# Altium PCB PCB1.PcbDoc (part 1 of 2)
Units mm, origin at the board's own origin, x right, y up, seen from the top; angles counter-clockwise.
Board outline 210 x 140 mm, 2 copper layers (Top Layer, Bottom Layer); 228 components, 149 nets, 688 pads, 245 vias.
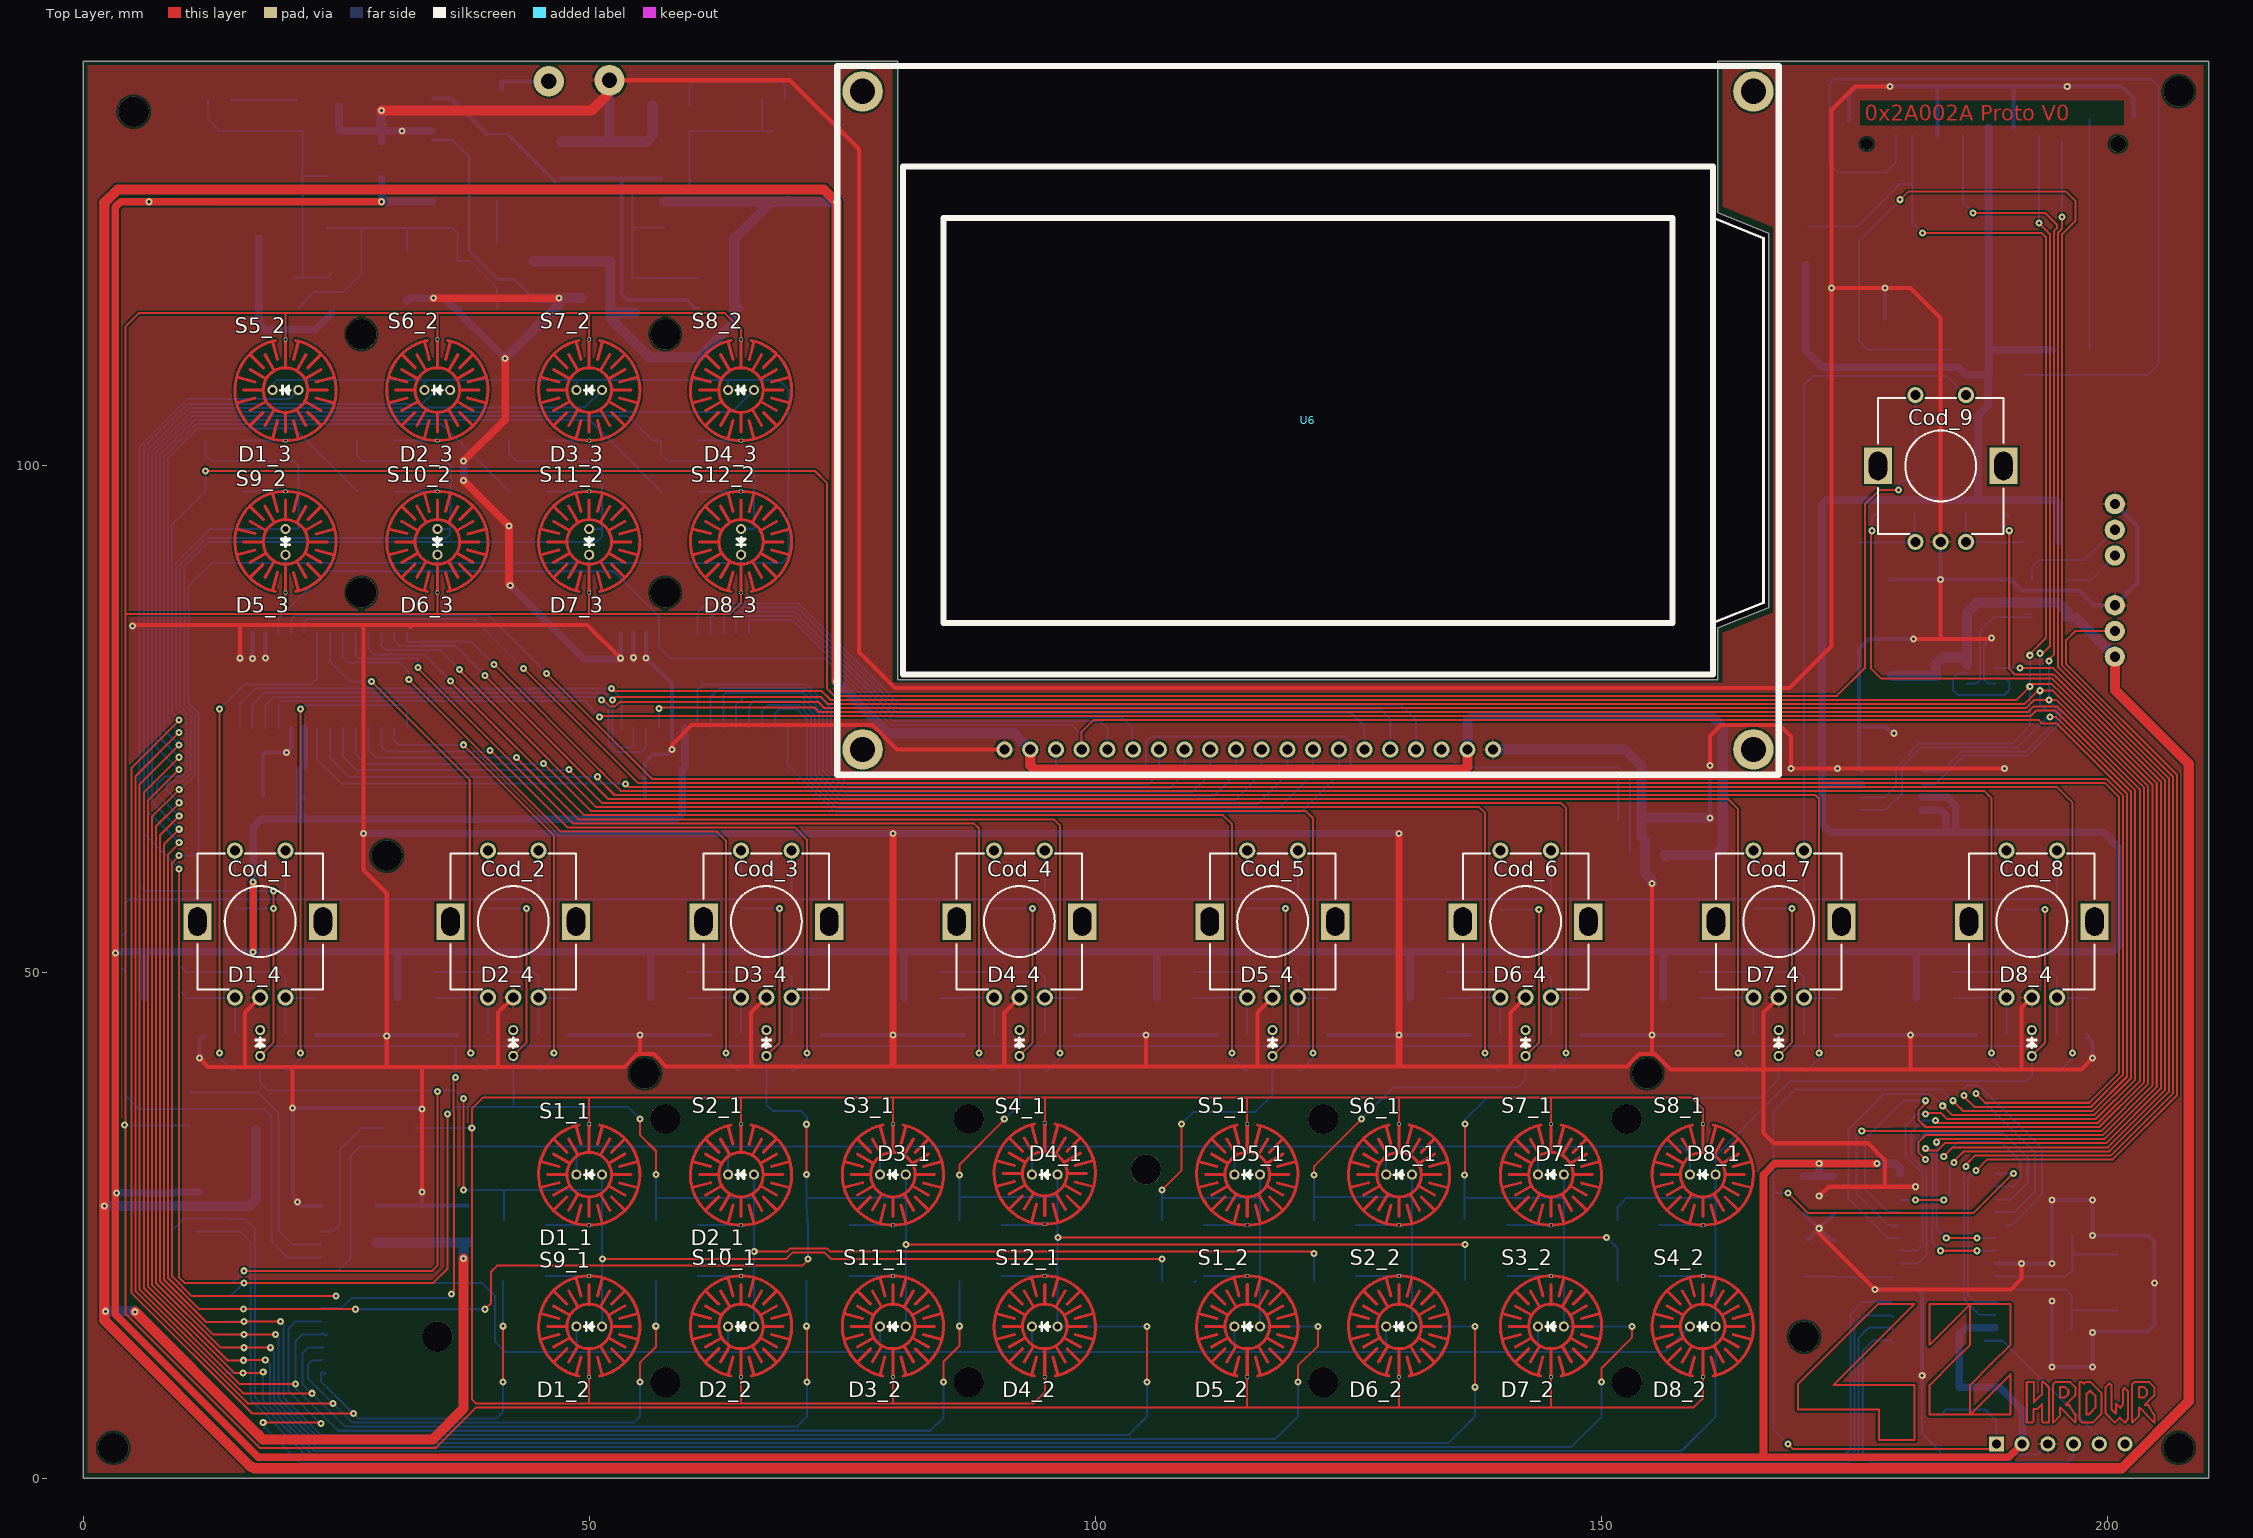
[diagram p0: Top Layer view]
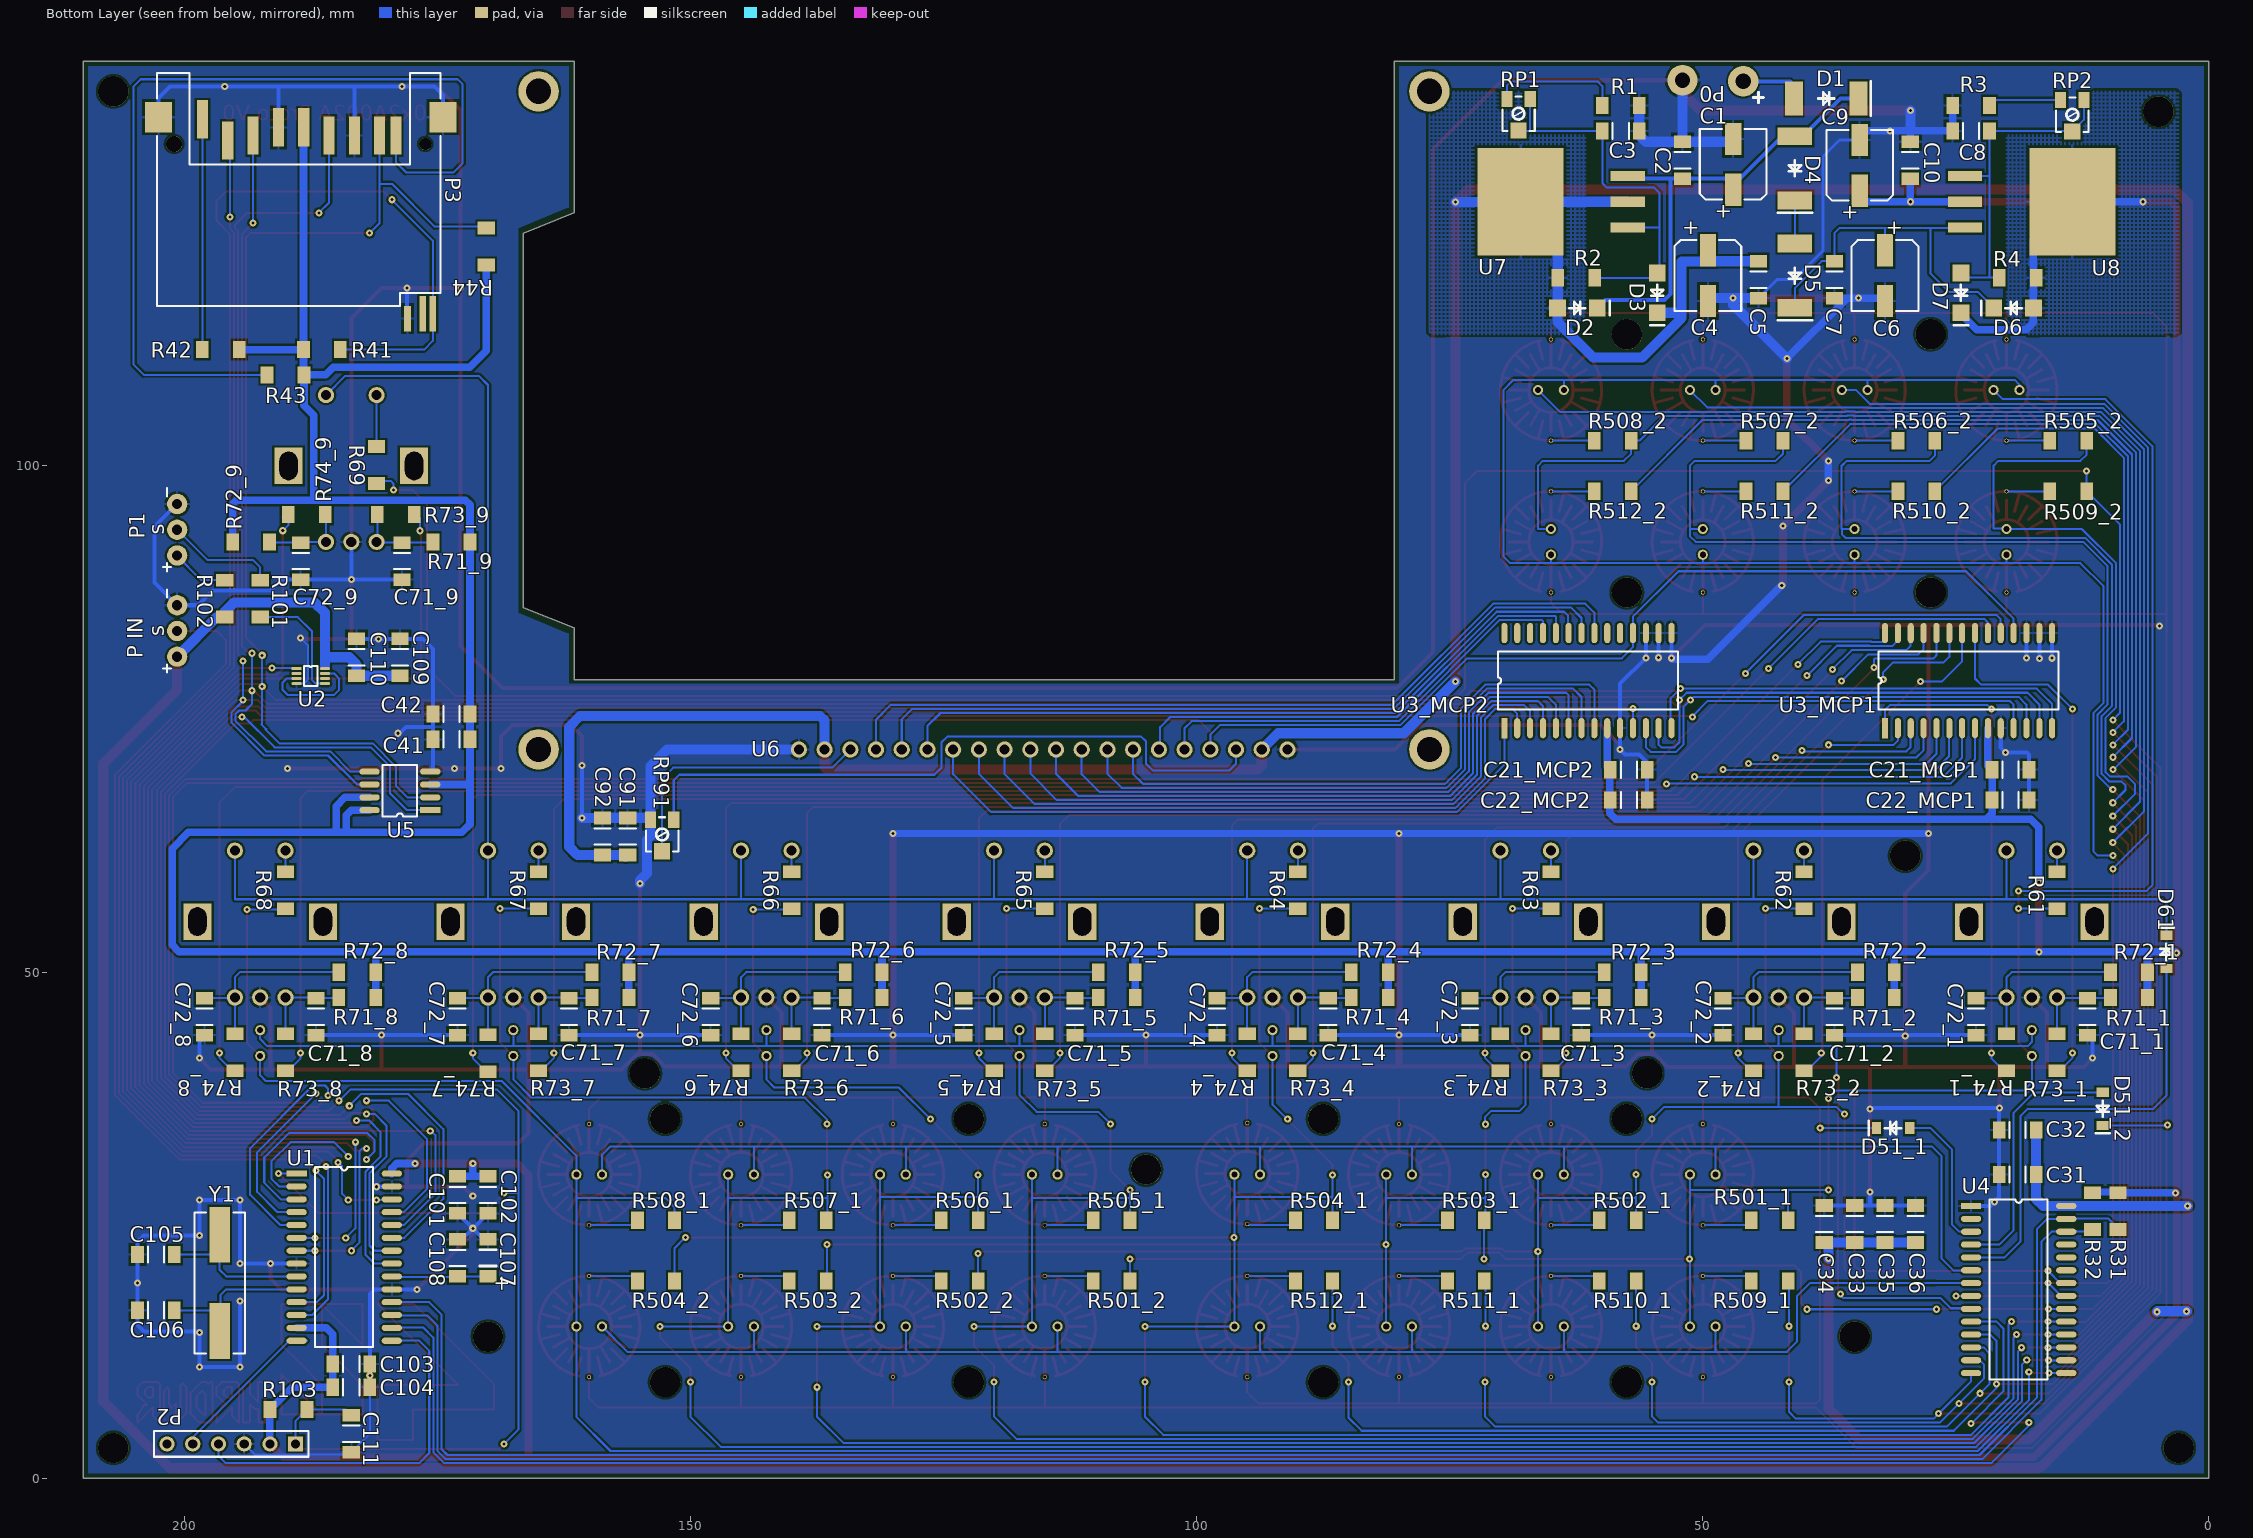
[diagram p1: Bottom Layer view, seen from below]

## Layer stack, top to bottom
Top Solder: solder mask 0.0102, Solder Resist, Dk 3.5
Top Layer: signal copper 0.0356
Dielectric 1: dielectric 0.32, FR-4, Dk 4.8
Bottom Layer: signal copper 0.0356
Bottom Solder: solder mask 0.0102, Solder Resist, Dk 3.5

## Board outline
0,0 0,140 80.5,140 80.5,78.9 161.5,78.9 161.5,84 166.5,86 166.5,109.5 166.5,123 161.5,125 161.5,140 210,140 210,0

## Design rules (kind name [scope] priority, off if disabled: settings)
Clearance [All] p1: gap=0.2
HoleSize [All] p1: absolutevalues=TRUE maxlimit=3 minlimit=0.3 maxpercent=80.000 minpercent=20.000
MinimumSolderMaskSliver [All] p1: minsoldermaskwidth=0.1
NetAntennae NetAntennaePad [HasFootprint('PAD')] p1: netantennaetolerance=42
NetAntennae NetAntennae_1 [All] p2: netantennaetolerance=0
PolygonConnect PolygonConnect_2 [IsVia] p1: connectstyle=Direct reliefconductorwidth=0.254 reliefentries=4 polygonreliefangle="90 Angle" airgapwidth=0.254
PolygonConnect PolygonConnect_1 [All] p2: connectstyle=Relief reliefconductorwidth=0.254 reliefentries=4 polygonreliefangle="90 Angle" airgapwidth=0.254
RoutingVias [All] p1: holewidth=0.711 width=1.27 viastyle="Through Hole" minholewidth=0.3 minwidth=0.6 maxholewidth=0.711 maxwidth=1.27
SilkToBoardRegionClearance [not HasFootprint('LCD-128H064A')] p1:
SilkToSilkClearance [All] p1: silktosilkclearance=0.1
SilkToSolderMaskClearance [IsPad] p1: minsilkscreentomaskgap=0.1 clearancetoexposedcopper=TRUE
SolderMaskExpansion [All] p1: expansion=0.102
UnpouredPolygon [All] p1: allowunpoured=FALSE
Width [All] p1: maxlimit=1 minlimit=0.2 preferedwidth=0.2
23 further rules are at their usual default settings.

## Classes and differential pairs
component class 1: C71_1 C72_1 R71_1 R72_1 R73_1 R74_1
component class 2: C71_2 C72_2 R71_2 R72_2 R73_2 R74_2
component class 3: C71_3 C72_3 R71_3 R72_3 R73_3 R74_3
component class 4: C71_4 C72_4 R71_4 R72_4 R73_4 R74_4
component class 5: C71_5 C72_5 R71_5 R72_5 R73_5 R74_5
component class 6: C71_6 C72_6 R71_6 R72_6 R73_6 R74_6
component class 7: C71_7 C72_7 R71_7 R72_7 R73_7 R74_7
component class 8: C71_8 C72_8 R71_8 R72_8 R73_8 R74_8
component class 9: C71_9 C72_9 R71_9 R72_9 R73_9 R74_9
component class CoderSwitches: D61 R61 R62 R63 R64 R65 R66 R67 R68 R69
component class HT16: C31 C32 C33 C34 C35 C36 R31 R32 U4
component class MCP1: C21_MCP1 C22_MCP1 U3_MCP1
component class MCP2: C21_MCP2 C22_MCP2 U3_MCP2
component class MEM: C41 C42 P3 R41 R42 R43 U5
component class PWR: C1 C2 C3 C4 C5 C6 C7 C8 C9 C10 D1 D2 D3 D4 D5 D6 D7 P0 R1 R2 R3 R4 RP1 RP2 U7 U8
component class Screen: C91 C92 RP91 U6
component class uC: C101 C102 C103 C104 C105 C106 C107 C108 C109 C110 C111 P1 P2 "P IN" R101 R102 R103 U1 U2 Y1
channel class 2-MCP23S17: MCP1 MCP2
channel class 5-Pads: PadsPart1 PadsPart2
channel class 7-Encodeurs: 1 2 3 4 5 6 7 8 9
channel class 8-LEDx8: LedsPart1 LedsPart2 LedsPart3 LedsPart4

## Components (designator, comment, footprint, x,y, rotation, side; value= is the part's Value field where it differs from the comment)
C1 "470uF" "CAPA PANA SIZE D*" 47,129.8 r180 bottom
C2 "100nF" "capa 1206" 52,130.2 r270 bottom
C3 "10uF" "capa 1206" 58.1,133.1 r0 bottom
C4 "100uF" "CAPA PANA SIZE D*" 49.5,118.8 r0 bottom
C5 "100nF" "capa 1206" 44.5,118.4 r90 bottom
C6 "470uF" "CAPA PANA SIZE D*" 32,118.8 r0 bottom
C7 "100nF" "capa 1206" 37,118.4 r90 bottom
C8 "10uF" "capa 1206" 23.5,133.1 r180 bottom
C9 "100uF" "CAPA PANA SIZE D*" 34.5,129.7 r180 bottom
C10 "100nF" "capa 1206" 29.5,130.2 r270 bottom
C21_MCP1 "10uF" "capa 1206" 19.6,70 r180 bottom (schematic designator C21)
C21_MCP2 "10uF" "capa 1206" 57.3,70 r180 bottom (schematic designator C21)
C22_MCP1 "100nF" "capa 1206" 19.6,67 r180 bottom (schematic designator C22)
C22_MCP2 "100nF" "capa 1206" 57.3,67 r180 bottom (schematic designator C22)
C31 "10uF" "capa 1206" 18.9,30 r180 bottom
C32 "100nF" "capa 1206" 18.9,34.4 r180 bottom
C33 "10uF" "capa 1206" 35,25.125 r270 bottom
C34 "10uF" "capa 1206" 38,25.125 r270 bottom
C35 "10uF" "capa 1206" 32,25.125 r270 bottom
C36 "10uF" "capa 1206" 29,25.125 r270 bottom
C41 "10uF" "capa 1206" 173.6,73 r0 bottom
C42 "100nF" "capa 1206" 173.6,75.5 r0 bottom
C71_1 "10nF" "capa 1206" 12,45.6 r90 bottom (schematic designator C71)
C71_2 "10nF" "capa 1206" 37,45.6 r90 bottom (schematic designator C71)
C71_3 "10nF" "capa 1206" 62,45.6 r90 bottom (schematic designator C71)
C71_4 "10nF" "capa 1206" 87,45.6 r90 bottom (schematic designator C71)
C71_5 "10nF" "capa 1206" 112,45.6 r90 bottom (schematic designator C71)
C71_6 "10nF" "capa 1206" 137,45.6 r90 bottom (schematic designator C71)
C71_7 "10nF" "capa 1206" 162,45.6 r90 bottom (schematic designator C71)
C71_8 "10nF" "capa 1206" 187,45.6 r90 bottom (schematic designator C71)
C71_9 "10nF" "capa 1206" 178.5,90.6 r90 bottom (schematic designator C71)
C72_1 "10nF" "capa 1206" 23,45.6 r270 bottom (schematic designator C72)
C72_2 "10nF" "capa 1206" 48,45.6 r270 bottom (schematic designator C72)
C72_3 "10nF" "capa 1206" 73,45.6 r270 bottom (schematic designator C72)
C72_4 "10nF" "capa 1206" 98,45.6 r270 bottom locked (schematic designator C72)
C72_5 "10nF" "capa 1206" 123,45.6 r270 bottom (schematic designator C72)
C72_6 "10nF" "capa 1206" 148,45.6 r270 bottom (schematic designator C72)
C72_7 "10nF" "capa 1206" 173,45.6 r270 bottom (schematic designator C72)
C72_8 "10nF" "capa 1206" 198,45.6 r270 bottom (schematic designator C72)
C72_9 "10nF" "capa 1206" 188.5,90.6 r270 bottom (schematic designator C72)
C91 "10uF" "capa 1206" 156.2,63.4 r90 bottom
C92 "100nF" "capa 1206" 158.7,63.4 r90 bottom
C101 "10uF" "capa 1206" 173,28 r270 bottom
C102 "100nF" "capa 1206" 170,28 r270 bottom
C103 "10uF" "capa 1206" 183.5,11.3 r180 bottom
C104 "100nF" "capa 1206" 183.5,9 r180 bottom
C105 "22pF" "capa 1206" 202.8,22.1 r0 bottom
C106 "22pF" "capa 1206" 202.8,16.6 r0 bottom
C107 "10uF" "CAPA 1206 POL" 170,21.8 r90 bottom
C108 "100nF" "capa 1206" 173,21.775 r90 bottom
C109 "10uF" "capa 1206" 178.7,81.1 r90 bottom
C110 "100nF" "capa 1206" 183,81.1 r90 bottom
C111 "100nF" "capa 1206" 183.5,4.4 r90 bottom
Cod_1 "Switch" PEC11R-4xxxF-Sxxxx 17.5,55 r0 top
Cod_2 "Switch" PEC11R-4xxxF-Sxxxx 42.5,55 r0 top
Cod_3 "Switch" PEC11R-4xxxF-Sxxxx 67.5,55 r0 top locked
Cod_4 "Switch" PEC11R-4xxxF-Sxxxx 92.5,55 r0 top
Cod_5 "Switch" PEC11R-4xxxF-Sxxxx 117.5,55 r0 top
Cod_6 "Switch" PEC11R-4xxxF-Sxxxx 142.5,55 r0 top
Cod_7 "Switch" PEC11R-4xxxF-Sxxxx 167.5,55 r0 top locked
Cod_8 "Switch" PEC11R-4xxxF-Sxxxx 192.5,55 r0 top locked
Cod_9 "Switch" PEC11R-4xxxF-Sxxxx 183.5,100 r0 top locked
D1 "1N5401" "SMC Vishay" 37.8,136.3 r0 bottom
D1_1 "LED" LED-3mm 50,30 r180 top (schematic designator D1)
D1_2 "LED" LED-3mm 50,15 r180 top (schematic designator D1)
D1_3 "LED" LED-3mm 20,107.5 r180 top (schematic designator D1)
D1_4 "LED" LED-3mm 17.5,43 r90 top (schematic designator D1)
D2 "1N4001" DO-214AC(SMA) 62.4,115.6 r0 bottom
D2_1 "LED" LED-3mm 65,30 r180 top (schematic designator D2)
D2_2 "LED" LED-3mm 65,15 r180 top (schematic designator D2)
D2_3 "LED" LED-3mm 35,107.5 r180 top (schematic designator D2)
D2_4 "LED" LED-3mm 42.5,43 r90 top (schematic designator D2)
D3 "1N4001" DO-214AC(SMA) 54.5,117.1 r90 bottom
D3_1 "LED" LED-3mm 80,30 r180 top (schematic designator D3)
D3_2 "LED" LED-3mm 80,15 r180 top (schematic designator D3)
D3_3 "LED" LED-3mm 50,107.5 r180 top (schematic designator D3)
D3_4 "LED" LED-3mm 67.5,43 r90 top (schematic designator D3)
D4 "1N5401" "SMC Vishay" 40.9,129.4 r90 bottom
D4_1 "LED" LED-3mm 95,30 r180 top (schematic designator D4)
D4_2 "LED" LED-3mm 95,15 r180 top (schematic designator D4)
D4_3 "LED" LED-3mm 65,107.5 r180 top (schematic designator D4)
D4_4 "LED" LED-3mm 92.5,43 r90 top (schematic designator D4)
D5 "1N5401" "SMC Vishay" 40.9,118.8 r90 bottom
D5_1 "LED" LED-3mm 115,30 r180 top (schematic designator D5)
D5_2 "LED" LED-3mm 115,15 r180 top (schematic designator D5)
D5_3 "LED" LED-3mm 20,92.5 r270 top (schematic designator D5)
D5_4 "LED" LED-3mm 117.5,43 r90 top (schematic designator D5)
D6 "1N4001" DO-214AC(SMA) 19.3,115.6 r180 bottom
D6_1 "LED" LED-3mm 130,30 r180 top (schematic designator D6)
D6_2 "LED" LED-3mm 130,15 r180 top (schematic designator D6)
D6_3 "LED" LED-3mm 35,92.5 r270 top (schematic designator D6)
D6_4 "LED" LED-3mm 142.5,43 r90 top (schematic designator D6)
D7 "1N4001" DO-214AC(SMA) 24.5,117.1 r90 bottom
D7_1 "LED" LED-3mm 145,30 r180 top (schematic designator D7)
D7_2 "LED" LED-3mm 145,15 r180 top (schematic designator D7)
D7_3 "LED" LED-3mm 50,92.5 r270 top (schematic designator D7)
D7_4 "LED" LED-3mm 167.5,43 r90 top (schematic designator D7)
D8_1 "LED" LED-3mm 160,30 r180 top (schematic designator D8)
D8_2 "LED" LED-3mm 160,15 r180 top (schematic designator D8)
D8_3 "LED" LED-3mm 65,92.5 r270 top (schematic designator D8)
D8_4 "LED" LED-3mm 192.5,43 r90 top (schematic designator D8)
D51_1 "BAV20W" "Diode SOD-123" 31.2,34.6 r180 bottom (schematic designator D51)
D51_2 "BAV20W" "Diode SOD-123" 10.5,36.5 r90 bottom (schematic designator D51)
D61 "BAV20W" "Diode SOD-123" 4.2,52 r270 bottom
P0 "Power Input" PWR 49,138 r0 bottom
P1 "MIDI Out" MIDI 200.7,93.7 r90 bottom
P2 "Program / Debug" HDR1X6 189,3.4 r0 bottom
P3 "SDAMB-01215BT00" SDAMB-01215BT00 176.2,131.8 r0 bottom locked
"P IN" "MIDI IN Opt" MIDI 200.7,83.7 r90 bottom
R1 "680" "RES 1206" 58,135.6 r0 bottom
R2 "240" "RES 1206" 62.6,118.6 r180 bottom
R3 "330" "RES 1206" 23.4,135.6 r0 bottom
R4 "240" "RES 1206" 18.8,118.6 r0 bottom
R31 "10K" "RES 1206" 9,26.5 r270 bottom
R32 "10K" "RES 1206" 11.5,26.3 r90 bottom
R41 "10K" "RES 1206" 186.3,111.5 r0 bottom
R42 "10K" "RES 1206" 196.5,111.5 r180 bottom
R43 "10K" "RES 1206" 190.1,109 r180 bottom
R44 "10K" "RES 1206" 170.178,121.775 r270 bottom
R61 "39k" "RES 1206" 15,58 r90 bottom
R62 "39k" "RES 1206" 40,58 r90 bottom
R63 "39k" "RES 1206" 65,58 r90 bottom
R64 "39k" "RES 1206" 90,58 r90 bottom
R65 "39k" "RES 1206" 115,58 r90 bottom
R66 "39k" "RES 1206" 140,58 r90 bottom
R67 "39k" "RES 1206" 165,58 r90 bottom
R68 "39k" "RES 1206" 190,58 r90 bottom
R69 "39k" "RES 1206" 181,100 r90 bottom
R71_1 "10K" "RES 1206" 8,47.5 r180 bottom (schematic designator R71)
R71_2 "10K" "RES 1206" 33,47.5 r180 bottom (schematic designator R71)
R71_3 "10K" "RES 1206" 58,47.5 r180 bottom (schematic designator R71)
R71_4 "10K" "RES 1206" 83,47.5 r180 bottom (schematic designator R71)
R71_5 "10K" "RES 1206" 108,47.5 r180 bottom (schematic designator R71)
R71_6 "10K" "RES 1206" 133,47.5 r180 bottom (schematic designator R71)
R71_7 "10K" "RES 1206" 158,47.5 r180 bottom (schematic designator R71)
R71_8 "10K" "RES 1206" 183,47.5 r180 bottom (schematic designator R71)
R71_9 "10K" "RES 1206" 173.7,92.5 r180 bottom (schematic designator R71)
R72_1 "10K" "RES 1206" 8,50 r180 bottom (schematic designator R72)
R72_2 "10K" "RES 1206" 33,50 r180 bottom (schematic designator R72)
R72_3 "10K" "RES 1206" 58,50 r180 bottom (schematic designator R72)
R72_4 "10K" "RES 1206" 83,50 r180 bottom (schematic designator R72)
R72_5 "10K" "RES 1206" 108,50 r180 bottom (schematic designator R72)
R72_6 "10K" "RES 1206" 133,50 r180 bottom (schematic designator R72)
R72_7 "10K" "RES 1206" 158,50 r180 bottom (schematic designator R72)
R72_8 "10K" "RES 1206" 183,50 r180 bottom (schematic designator R72)
R72_9 "10K" "RES 1206" 193.3,92.5 r0 bottom (schematic designator R72)
R73_1 "10K" "RES 1206" 15,42.2 r270 bottom (schematic designator R73)
R73_2 "10K" "RES 1206" 40,42.2 r270 bottom (schematic designator R73)
R73_3 "10K" "RES 1206" 65,42.2 r270 bottom (schematic designator R73)
R73_4 "10K" "RES 1206" 90,42.2 r270 bottom (schematic designator R73)
R73_5 "10K" "RES 1206" 115,42.2 r270 bottom (schematic designator R73)
R73_6 "10K" "RES 1206" 140,42.2 r270 bottom (schematic designator R73)
R73_7 "10K" "RES 1206" 165,42.2 r270 bottom (schematic designator R73)
R73_8 "10K" "RES 1206" 190,42.2 r270 bottom (schematic designator R73)
R73_9 "10K" "RES 1206" 179.2,95.2 r180 bottom (schematic designator R73)
R74_1 "10K" "RES 1206" 20,42.2 r270 bottom (schematic designator R74)
R74_2 "10K" "RES 1206" 45,42.2 r270 bottom (schematic designator R74)
R74_3 "10K" "RES 1206" 70,42.2 r270 bottom (schematic designator R74)
R74_4 "10K" "RES 1206" 95,42.2 r270 bottom (schematic designator R74)
R74_5 "10K" "RES 1206" 120,42.2 r270 bottom (schematic designator R74)
R74_6 "10K" "RES 1206" 145,42.2 r270 bottom (schematic designator R74)
R74_7 "10K" "RES 1206" 170,42.1 r270 bottom (schematic designator R74)
R74_8 "10K" "RES 1206" 195,42.2 r270 bottom (schematic designator R74)
R74_9 "10K" "RES 1206" 187.8,95.2 r0 bottom (schematic designator R74)
R101 "220" "RES 1206" 192.5,87 r270 bottom
R102 "220" "RES 1206" 196,87 r270 bottom
R103 "10K" "RES 1206" 189.6,6.8 r0 bottom
R501_1 "39k" "RES 1206" 43.3,25.5 r0 bottom (schematic designator R501)
R501_2 "39k" "RES 1206" 108.3,19.5 r0 bottom (schematic designator R501)
R502_1 "39k" "RES 1206" 58.3,25.5 r0 bottom (schematic designator R502)
R502_2 "39k" "RES 1206" 123.3,19.5 r0 bottom (schematic designator R502)
R503_1 "39k" "RES 1206" 73.3,25.5 r0 bottom (schematic designator R503)
R503_2 "39k" "RES 1206" 138.3,19.5 r0 bottom (schematic designator R503)
R504_1 "39k" "RES 1206" 88.3,25.5 r0 bottom (schematic designator R504)
R504_2 "39k" "RES 1206" 153.3,19.5 r0 bottom (schematic designator R504)
R505_1 "39k" "RES 1206" 108.3,25.5 r0 bottom (schematic designator R505)
R505_2 "39k" "RES 1206" 13.8,102.5 r0 bottom (schematic designator R505)
R506_1 "39k" "RES 1206" 123.3,25.5 r0 bottom (schematic designator R506)
R506_2 "39k" "RES 1206" 28.8,102.5 r0 bottom (schematic designator R506)
R507_1 "39k" "RES 1206" 138.3,25.5 r0 bottom (schematic designator R507)
R507_2 "39k" "RES 1206" 43.8,102.5 r0 bottom (schematic designator R507)
R508_1 "39k" "RES 1206" 153.3,25.5 r0 bottom (schematic designator R508)
R508_2 "39k" "RES 1206" 58.8,102.5 r0 bottom (schematic designator R508)
R509_1 "39k" "RES 1206" 43.3,19.5 r0 bottom (schematic designator R509)
R509_2 "39k" "RES 1206" 13.8,97.5 r0 bottom (schematic designator R509)
R510_1 "39k" "RES 1206" 58.3,19.5 r0 bottom (schematic designator R510)
R510_2 "39k" "RES 1206" 28.8,97.5 r0 bottom (schematic designator R510)
R511_1 "39k" "RES 1206" 73.3,19.5 r0 bottom (schematic designator R511)
R511_2 "39k" "RES 1206" 43.8,97.5 r0 bottom (schematic designator R511)
R512_1 "39k" "RES 1206" 88.3,19.5 r0 bottom (schematic designator R512)
R512_2 "39k" "RES 1206" 58.8,97.5 r0 bottom (schematic designator R512)
RP1 "390" 3313J-1 68.2,134.8 r0 bottom
RP2 "100" 3313J-1 13.5,134.7 r0 bottom
RP91 "10K" 3313J-1 152.8,63.6 r0 bottom
S1_1 "SW-PB" PAD 50,30 r90 top (schematic designator S1)
S1_2 "SW-PB" PAD 115,15 r270 top (schematic designator S1)
S2_1 "SW-PB" PAD 65,30 r90 top (schematic designator S2)
S2_2 "SW-PB" PAD 130,15 r270 top (schematic designator S2)
S3_1 "SW-PB" PAD 80,30 r90 top (schematic designator S3)
S3_2 "SW-PB" PAD 145,15 r270 top (schematic designator S3)
S4_1 "SW-PB" PAD 95,30.1 r90 top (schematic designator S4)
S4_2 "SW-PB" PAD 160,15 r270 top (schematic designator S4)
S5_1 "SW-PB" PAD 115,30 r90 top (schematic designator S5)
S5_2 "SW-PB" PAD 20,107.5 r90 top (schematic designator S5)
S6_1 "SW-PB" PAD 130,30 r90 top (schematic designator S6)
S6_2 "SW-PB" PAD 35,107.5 r90 top (schematic designator S6)
S7_1 "SW-PB" PAD 145,30 r90 top (schematic designator S7)
S7_2 "SW-PB" PAD 50,107.5 r90 top (schematic designator S7)
S8_1 "SW-PB" PAD 160,30 r90 top (schematic designator S8)
S8_2 "SW-PB" PAD 65,107.5 r90 top (schematic designator S8)
S9_1 "SW-PB" PAD 50,15 r270 top (schematic designator S9)
S9_2 "SW-PB" PAD 20,92.5 r270 top (schematic designator S9)
S10_1 "SW-PB" PAD 65,15 r270 top (schematic designator S10)
S10_2 "SW-PB" PAD 35,92.5 r270 top (schematic designator S10)
S11_1 "SW-PB" PAD 80,15 r270 top (schematic designator S11)
S11_2 "SW-PB" PAD 50,92.5 r270 top (schematic designator S11)
S12_1 "SW-PB" PAD 95,15 r270 top (schematic designator S12)
S12_2 "SW-PB" PAD 65,92.5 r270 top (schematic designator S12)
U1 "PIC32MX150F128B" PIC32MX150F128B-I/SO 188.9,30.1 r180 bottom locked
U2 "NL37WZ07USG" NL37WZ07USG 188.9,80 r180 bottom
U3_MCP1 "MCP23S17" MCP23S17-E/SO 32,74.1 r90 bottom (schematic designator U3)
U3_MCP2 "MCP23S17" MCP23S17-E/SO 69.6,74.1 r90 bottom locked (schematic designator U3)
U4 "HT16K33" "HT16K33 SOP" 23.5,26.9 r180 bottom
U5 "SST25VF020B" SST25VF020B 175.7,66 r0 bottom
U6 "LCD-128H064A" LCD-128H064A 121,104.5 r0 top locked
U7 "LM317" D2PAK 57.4,126.1 r90 bottom
U8 "LM317" D2PAK 24.1,126.1 r270 bottom
Y1 "8Mhz" "HC49/4H SMX CRYSTAL" 196.5,19.3 r90 bottom

## Footprints (in the part's own frame and the unit in brackets; to place one, negate y for a bottom-side part, rotate by r counter-clockwise, add the part's x,y. Pads: shape width x height; smd on the part's side, far side on the other; paste and mask are expansions set on the pad)
3313J-1 [mm]
  rect 1.1x1.6 smd: 1(-1.15,-1.45) 2(1.15,-1.45)
  rect 1.6x1.6 smd: 3(0,1.65)
  silkscreen extent -1.6,-1.7 1.6,1.7
"capa 1206" [mm]
  rect 1.25x1.7 smd: 1(-1.825,0) 2(1.825,0)
  silkscreen extent -0.8,-0.8 0.8,0.8
"CAPA 1206 POL" [mm]
  rect 1.25x1.7 smd: 1(-1.85,0) 2(1.8,0)
  silkscreen extent -0.83,-0.8 0.77,0.8
"CAPA PANA SIZE D*" [mm]
  rect 1.6x3.2 smd: 1(0,-2.5) 2(0,2.5)
  silkscreen extent -3.3,-3.5 3.3,3.5
D2PAK [mm]
  rect 1x3.4 smd: 1(-2.54,0) 2(0,0) 3(2.54,0)
  rect 10.6x8.5 smd: 2(0,10.6)
"Diode SOD-123" [mm]
  rect 0.91x1.22 smd: 1(1.635,0) 2(-1.635,0)
  silkscreen extent -2.4,-0.7 0.8,0.7
DO-214AC(SMA) [mm]
  rect 1.65x1.67 smd: 1(1.96,0) 2(-1.96,0)
  silkscreen extent -3.2,-0.7 0.8,0.7
"HC49/4H SMX CRYSTAL" [mm]
  rect 5.5x2 smd: 1(-4.75,0) 2(4.75,0)
  silkscreen extent -6.95,-2.5 6.95,2.5
HDR1X6 [mm] "Connector; Header; 6 Position"
  rect 1.5x1.5 hole 0.9: 1(0,0)
  round 1.5 hole 0.9: 2(2.54,0) 3(5.08,0) 4(7.62,0) 5(10.16,0) 6(12.7,0)
  silkscreen extent -1.27,-1.27 13.97,1.27
"HT16K33 SOP" [mm]
  rect 2x0.6 smd: 1(0,0)
  oval 2x0.6 smd: 2(0,-1.27) 3(0,-2.54) 4(0,-3.81) 5(0,-5.08) 6(0,-6.35) 7(0,-7.62) 8(0,-8.89) 9(0,-10.16) 10(0,-11.43) 11(0,-12.7) 12(0,-13.97) 13(0,-15.24) 14(0,-16.51) 15(9.4,-16.51) 16(9.4,-15.24) 17(9.4,-13.97) 18(9.4,-12.7) 19(9.4,-11.43) 20(9.4,-10.16) 21(9.4,-8.89) 22(9.4,-7.62) 23(9.4,-6.35) 24(9.4,-5.08) 25(9.4,-3.81) 26(9.4,-2.54) 27(9.4,-1.27) 28(9.4,0)
  silkscreen extent 1.84,-17.14 7.56,0.64
LCD-128H064A [mm]
  round 1.6 hole 1: 1(18.288,-32.512) 2(15.748,-32.512) 3(13.208,-32.512) 4(10.668,-32.512) 5(8.128,-32.512) 6(5.588,-32.512) 7(3.048,-32.512) 8(0.508,-32.512) 9(-2.032,-32.512) 10(-4.572,-32.512) 11(-7.112,-32.512) 12(-9.652,-32.512) 13(-12.192,-32.512) 14(-14.732,-32.512) 15(-17.272,-32.512) 16(-19.812,-32.512) 17(-22.352,-32.512) 18(-24.892,-32.512) 19(-27.432,-32.512) 20(-29.972,-32.512)
  round 4 hole 2.5: ""(-44,-32.5) ""(-44,32.5) ""(44,-32.5) ""(44,32.5)
  silkscreen extent -46.5,-35 46.5,35
LED-3mm [mm]
  round 1 hole 0.6: 1(-1.27,0) 2(1.27,0)
  silkscreen extent -0.48,-0.43 0.5,0.43
MCP23S17-E/SO [mm]
  rect 2x0.6 smd: 1(0,0)
  oval 2x0.6 smd: 2(0,-1.27) 3(0,-2.54) 4(0,-3.81) 5(0,-5.08) 6(0,-6.35) 7(0,-7.62) 8(0,-8.89) 9(0,-10.16) 10(0,-11.43) 11(0,-12.7) 12(0,-13.97) 13(0,-15.24) 14(0,-16.51) 15(9.4,-16.51) 16(9.4,-15.24) 17(9.4,-13.97) 18(9.4,-12.7) 19(9.4,-11.43) 20(9.4,-10.16) 21(9.4,-8.89) 22(9.4,-7.62) 23(9.4,-6.35) 24(9.4,-5.08) 25(9.4,-3.81) 26(9.4,-2.54) 27(9.4,-1.27) 28(9.4,0)
  silkscreen extent 1.84,-17.14 7.57,0.63
MIDI [mm]
  round 2 hole 1: 1(-2.54,0) 2(0,0) 3(2.54,0)
  silkscreen extent -4.1,0.6 4.1,1.4
NL37WZ07USG [mm]
  rect 1x0.3 smd: 1(0,0)
  oval 1x0.3 smd: 2(0,-0.5) 3(0,-1) 4(0,-1.5) 5(2.8,-1.5) 6(2.8,-1) 7(2.8,-0.5) 8(2.8,0)
  silkscreen extent 0.75,-1.75 2.05,0.25
PAD [mm]
  round 0.4 hole 0.3: 1(5,0) 2(-5,0)
  Top Layer circle w0.3: c0,0 r2.2
  Top Layer lines w0.3: -1.289,4.825 -0.801,3.006 ; 1.296,4.823 0.808,3 ; 0,4.125 0,2.2 ; -3.529,3.534 -2.197,2.203 ; 3.534,3.529 2.203,2.197 ; -2.033,3.521 -1.1,1.905 ; 2.031,3.518 1.1,1.905 ; 3.521,2.033 1.905,1.1 ; -3.518,2.031 -1.905,1.1 ; -4.823,1.296 -3,0.808 ; 4.825,1.289 3.006,0.801 ; 4.899,1 ccw(c0,0) 4.899,-1 ; -4.125,0 -2.2,0 ; 2.2,0 5,0 ; -3.006,-0.801 -4.825,-1.289 ; 3,-0.808 4.823,-1.296 ; -1.905,-1.1 -3.521,-2.033 ; 1.905,-1.1 3.518,-2.031 ; -1.1,-1.905 -2.031,-3.518 ; 1.1,-1.905 2.033,-3.521 ; -2.203,-2.197 -3.534,-3.529 ; 0,-2.2 0,-4.125 ; 2.197,-2.203 3.529,-3.534 ; -0.808,-3 -1.296,-4.823 ; 0.801,-3.006 1.289,-4.825
PEC11R-4xxxF-Sxxxx [mm]
  round 1.6 hole 1: 1(-2.5,7) 2(2.5,7) A(-2.5,-7.5) B(2.5,-7.5) C(0,-7.5)
  rect 2.8x3.6 hole 1.8 slot 2.8 at 90 deg: ""(-6.2,0) ""(6.2,0)
  silkscreen extent -6.2,-6.7 6.2,6.7
PIC32MX150F128B-I/SO [mm]
  rect 2x0.6 smd: 1(0,0)
  oval 2x0.6 smd: 2(0,-1.27) 3(0,-2.54) 4(0,-3.81) 5(0,-5.08) 6(0,-6.35) 7(0,-7.62) 8(0,-8.89) 9(0,-10.16) 10(0,-11.43) 11(0,-12.7) 12(0,-13.97) 13(0,-15.24) 14(0,-16.51) 15(9.4,-16.51) 16(9.4,-15.24) 17(9.4,-13.97) 18(9.4,-12.7) 19(9.4,-11.43) 20(9.4,-10.16) 21(9.4,-8.89) 22(9.4,-7.62) 23(9.4,-6.35) 24(9.4,-5.08) 25(9.4,-3.81) 26(9.4,-2.54) 27(9.4,-1.27) 28(9.4,0)
  silkscreen extent 1.83,-17.14 7.56,0.64
PWR [mm]
  round 3 hole 1.5: 1(-3,0) 2(3,-0.1)
  silkscreen extent -5,1.1 -4,2.1
"RES 1206" [mm]
  rect 1.25x1.7 smd: 1(-1.725,0) 2(1.925,0)
SDAMB-01215BT00 [mm]
  rect 2.7x3 smd: 0(-1.75,-2.65) 0(26.35,-2.65)
  rect 1.1x3.79 smd: 1(19.5,-0.35) 2(17,-0.85) 3(14.5,-1.65) 4(12,-1.65) 5(9.5,-0.85) 6(7,-0.85) 7(4.5,-0.85) 8(2.9,-0.85) 9(22,-2.45)
  rect 0.65x3.5 smd: S1(0.25,16.75) S2(-0.75,16.75)
  rect 0.7x2.5 smd: S3(1.75,17.25)
  round 1.2 hole 1.2: x(0,0)
  round 1.6 hole 1.6: x(24.8,0)
  silkscreen extent -1.5,-7 26.5,16
"SMC Vishay" [mm]
  rect 1.75x3.4 smd: 1(3.18,0) 2(-3.18,0)
  silkscreen extent -4.4,-1.7 0.8,1.7
SST25VF020B [mm]
  rect 2x0.6 smd: 1(0,0)
  oval 2x0.6 smd: 2(0,-1.27) 3(0,-2.54) 4(0,-3.81) 5(6,-3.81) 6(6,-2.54) 7(6,-1.27) 8(6,0)
  silkscreen extent 1.3,-4.44 4.7,0.64

## Part data
C1 C4 C6 C9 C107: library part "Cap Pol1", "Polarized Capacitor (Radial)"
C2 C3 C5 C7 C8 C10 C21_MCP1 C21_MCP2 C22_MCP1 C22_MCP2 C31 C32 C33 C34 C35 C36 C41 C42 C71_1 C71_2 C71_3 C71_4 C71_5 C71_6 C71_7 C71_8 C71_9 C72_1 C72_2 C72_3 C72_4 C72_5 C72_6 C72_7 C72_8 C72_9 C91 C92 C101 C102 C103 C104 C105 C106 C108 C109 C110 C111: library part Cap, "Capacitor"
Cod_1 Cod_2 Cod_3 Cod_4 Cod_5 Cod_6 Cod_7 Cod_8 Cod_9: library part Cod
D1 D2 D3 D4 D5 D6 D7 D51_1 D51_2 D61: library part Diode, "Default Diode"
D1_1 D1_2 D1_3 D1_4 D2_1 D2_2 D2_3 D2_4 D3_1 D3_2 D3_3 D3_4 D4_1 D4_2 D4_3 D4_4 D5_1 D5_2 D5_3 D5_4 D6_1 D6_2 D6_3 D6_4 D7_1 D7_2 D7_3 D7_4 D8_1 D8_2 D8_3 D8_4: library part LED0, "Diffused Green 3mm LED"
P0: library part "Header 2", "Header, 2-Pin"
P1 "P IN": library part "Header 3", "Header, 3-Pin"
P2: library part "Header 6", "Header, 6-Pin"
R1 R2 R3 R4 R31 R32 R41 R42 R43 R44 R61 R62 R63 R64 R65 R66 R67 R68 R69 R71_1 R71_2 R71_3 R71_4 R71_5 R71_6 R71_7 R71_8 R71_9 R72_1 R72_2 R72_3 R72_4 R72_5 R72_6 R72_7 R72_8 R72_9 R73_1 R73_2 R73_3 R73_4 R73_5 R73_6 R73_7 R73_8 R73_9 R74_1 R74_2 R74_3 R74_4 R74_5 R74_6 R74_7 R74_8 R74_9 R101 R102 R103 R501_1 R501_2 R502_1 R502_2 R503_1 R503_2 R504_1 R504_2 R505_1 R505_2 R506_1 R506_2 R507_1 R507_2 R508_1 R508_2 R509_1 R509_2 R510_1 R510_2 R511_1 R511_2 R512_1 R512_2: library part Res1, "Resistor"
RP1 RP2 RP91: library part RPot, "Potentiometer"
S1_1 S1_2 S2_1 S2_2 S3_1 S3_2 S4_1 S4_2 S5_1 S5_2 S6_1 S6_2 S7_1 S7_2 S8_1 S8_2 S9_1 S9_2 S10_1 S10_2 S11_1 S11_2 S12_1 S12_2: "Switch"
Y1: library part XTAL, "Crystal Oscillator"

## Free pads (board coordinates)
  round 3 hole 3 unplated: 0(3,3) 0(5,135) 0(27.5,87.5) 0(27.5,113) 0(30,61.5) 0(35,14) 0(55.5,40) 0(57.5,9.5) 0(57.5,35.5) 0(57.5,87.5) 0(57.5,113) 0(87.5,9.5) 0(87.5,35.5) 0(105,30.5) 0(122.5,9.5) 0(122.5,35.5) 0(152.5,9.5) 0(152.5,35.5) 0(154.5,40) 0(170,14) 0(207,3) 0(207,137)

## Via types
v1: diameter 0.7, hole 0.3, Top Layer to Bottom Layer, 245 vias

## Nets (pads, with @x,y where several pads share a name; then routed paths per layer and width w, separated by ;. In a path a pad name is that pad's centre, name@x,y a point inside that pad or via, vN(x,y) a via of type N, cw(c..) or ccw(c..) an arc to the next point about the centre after c; other vN are vias at no path point)
3.3V: C9.1 C10.2 C21_MCP1.1 C21_MCP2.1 C22_MCP1.1 C22_MCP2.1 C41.1 C42.1 C101.1 C102.1 C103.1 C104.1 D6.1 D7.2 P2.2 P3.4 R4.1 R31.1 R32.2 R41.2 R42.2 R43.2 R44.2 R71_1.2 R71_2.2 R71_3.2 R71_4.2 R71_5.2 R71_6.2 R71_7.2 R71_8.2 R71_9.2 R72_1.2 R72_2.2 R72_3.2 R72_4.2 R72_5.2 R72_6.2 R72_7.2 R72_8.2 R72_9.2 R103.2 U1.13 U1.28 U3_MCP1.9 U3_MCP2.9 U5.3 U5.7 U5.8 U8.2 | length 931.8
  Top Layer w0.75: 3.175,125.555 3.175,35.283 ; 3.2,35.308 3.175,35.283 ; 3.3,125.68 3.72,126.1 v1(6.5,126.1) v1(29.5,126.1) ; v1(16.8,52) v1(16.8,58.9) ; 166,2.396 166,30 167.1,31.1 v1(177.2,31.1) ; P2.2@191.54,3.4 190.215,2.075 17.325,2.075 3.175,16.225 3.175,35.283
  Bottom Layer w0.75: v1(3.2,51.9) 3.3,52 v1(16.8,52) 131.075,52 ; v1(3.3,28.2) 8.929,28.2 9,28.271 R32.2@11.499,28.3 ; R71_1.2@6.075,47.5 R72_1.2@6.075,50 6.075,51.975 ; v1(6.5,126.1) U8.2@13.5,126.1 ; v1(16.8,58.9) 16.8,64.3 17.6,65.1 22,65.1 ; U8.2@17.375,122.425 17.375,118.5 17.34,118.335 17.34,114.16 18.04,113.46 22.92,113.46 D7.2@24.55,115.09 ; C22_MCP1.1@21.425,67.5 C21_MCP1.1@21.425,70 ; C22_MCP1.1@21.6,67.2 21.4,67 21.4,65.7 22,65.1 ; C21_MCP1.1@21.84,70.415 U3_MCP1.9@21.84,74.1 ; U8.2@24.1,126.1 v1(29.5,126.1) ; C10.2@29.5,128.375 v1(29.5,126.1) ; R71_2.2@31.075,47.5 R72_2.2@31.075,50 31.075,51.975 ; C9.1@34.5,126.1 v1(29.5,126.1) ; R71_3.2@56.075,47.5 R72_3.2@56.075,50 56.075,51.975 ; U3_MCP2.9@59.44,74.1 59.44,70.26 59.2,70.02 59.2,65.7 58.6,65.1 22,65.1 ; R71_4.2@81.075,47.5 R72_4.2@81.075,50 81.075,51.975 ; R71_5.2@106.075,47.5 R72_5.2@106.075,50 106.075,51.975 ; R71_6.2@131.075,47.5 R72_6.2@131.075,50 131.075,52 ; R71_7.2@156.075,47.5 R72_7.2@156.075,50 156.075,52 ; C102.1@170,29.825 171.5,29.825 ; R44.2@170.178,119.85 170.178,111.366 171.783,109.761 185.26,109.761 186.021,109 R43.2@188.175,109 ; v1(171.5,31.1) 171.5,29.825 ; 171.815,68.54 U5.3@175.7,68.54 ; C101.1@173,29.825 171.5,29.825 ; v1(177.2,31.1) 179,31.1 179.5,30.6 U1.28@179.5,30.1 ; R71_8.2@181.075,47.5 R72_8.2@181.075,50 181.075,52.025 ; U5.8@181.7,66 183.5,66 184,65.5 184,63.8 ; U5.7@181.7,67.27 184.13,67.27 185,66.4 185,63.8 ; 187.2,96.925 187.2,105.006 188.175,105.981 R43.2@188.175,109 ; P3.4@188.2,133.45 188.225,133.425 R41.2@188.225,111.5 ; U1.13@188.9,14.86 185.96,14.86 185.325,14.225 C103.1@185.325,11.3 C104.1@185.325,9 189.325,9 R103.2@191.525,6.8 191.54,6.785 P2.2@191.54,3.4 ; R42.2@194.575,111.5 R41.2@188.225,111.5 ; R72_9.2@195.225,92.5 195.225,96.275 194.873,96.627 172.227,96.627 171.775,96.175 R71_9.2@171.775,92.5 C42.1@171.775,75.5 C41.1@171.775,73 171.775,64.625 172.6,63.8 184,63.8 ; 131.075,52 131.1,52.025 181.075,52.025 ; 181.075,52.025 200.525,52.025 201.2,52.7 201.2,62.2 199.6,63.8 185,63.8 ; 184,63.8 185,63.8 ; R43.2@188.175,109 188.225,109.05 R41.2@188.225,111.5
5V: "P IN.1" C4.1 C5.2 C31.2 C32.2 C33.2 C34.2 C35.2 C36.2 C91.1 C92.1 C109.1 C110.1 D2.1 D3.2 R2.1 R102.2 U2.8 U4.28 U6.2 U6.19 U7.2 | length 820.6
  Top Layer w1: v1(5.15,16.45) 16.6,5 16.6,4.986 17.186,4.4 17.2,4.4 17.782,3.818 34.511,3.818 37.6,6.907 v1(37.6,21.7) ; v1(74.416,78.7) v1(74.416,126.083) 73.199,127.3 3.4,127.3 2.1,126 2.1,15.6 16.575,1.125 16.755,1.125 16.88,1 201.4,1 208,7.6 208,70.6 200.7,77.9 200.7,81.16 ; U6.19@93.568,71.988 93.568,70.432 94,70 136.5,70 136.748,70.248 U6.2@136.748,71.988
  Bottom Layer w1: v1(2.1,26.9) U4.28@14.1,26.9 16.4,26.9 17.075,27.575 C31.2@17.075,30 C32.2@17.075,34.4 ; v1(2.2,16.5) 5.1,16.5 v1(5.15,16.45) ; C36.2@29,23.3 C33.2@35,23.3 C34.2@38,23.3 ; v1(37.6,21.7) C34.2@37.6,23.3 ; C5.2@44.5,120.225 C4.1@49.5,120.225 ; C4.1@49.5,120.2 52.1,120.2 52.1,114.6 56,110.7 60.8,110.7 64.36,114.26 64.36,115.73 64.325,115.765 R2.1@64.325,118.6 64.325,122.425 U7.2@68,126.1 ; 52.54,115.14 D3.2@54.5,115.14 ; U7.2@57.4,126.1 U7.2@68,126.1 ; D2.1@64.5,115.6 D2.1@64.76,115.6 ; U7.2@69.8,126.1 U7.2@69.6,126.1 ; v1(74.416,78.7) 74.44,78.7 79.54,73.6 91.956,73.6 U6.19@93.568,71.988 ; v1(74.416,126.083) 69.817,126.083 69.7,126.2 U7.2@69.6,126.1 ; U6.2@136.748,71.988 136.748,74.848 137.2,75.3 160.9,75.3 161.975,74.225 161.975,62.375 161.175,61.575 C92.1@158.7,61.575 C91.1@156.2,61.575 C91.1@156.4,61.375 ; C109.1@178.7,79.275 C110.1@183.075,79.275 ; C110.1@183,79.275 183,80.4 183.7,81.1 186.1,81.1 ; 186.1,80.35 186.1,81.1 ; R102.2@195.875,85.075 196.785,85.075 200.7,81.16 ; R102.2@196,85.075 196,85.6 195.1,86.5 187.1,86.5 186.1,85.5 186.1,81.1 ; U7.2@68,126.1 U7.2@69.6,126.1
"/CS COD": U1.22 U3_MCP1.11 | length 258.9
  Top Layer w0.2: v1(51,75.2) v1@51.1,75.3 ; v1@51.163,75.363 v1@51.1,75.3 ; v1(182,36) 182,35.9 182.2,36.1 183.5,36.1 184.1,35.5 198.843,35.5 202.7,39.357 202.7,67.969 194.822,75.847 192.947,75.847 192.4,75.3 v1@51.1,75.3
  Bottom Layer w0.2: U3_MCP1.11@19.3,74.1 19.3,76.4 19.7,76.8 49.5,76.8 v1@51.05,75.25 ; U1.22@179.5,22.48 181.18,22.48 181.7,23 181.7,30.134 180,31.834 180,34.8 181.2,36 v1(182,36)
"/CS FLASH": U1.23 U5.1 | length 108.7
  Top Layer w0.2: v1(183.7,36.8) 184.6,35.9 198.677,35.9 202.3,39.523 202.3,41.803 ; v1(194.3,75.197) 194.906,75.197 202.3,67.803 202.3,41.841
  Bottom Layer w0.2: U5.1@175.7,66 178,66 179.7,67.7 179.7,70.334 181.566,72.2 191.069,72.2 194.2,75.331 194.3,75.231 v1(194.3,75.197) ; U1.23@179.5,23.75 178.25,23.75 174.4,27.6 174.4,34.5 177.85,37.95 182.55,37.95 v1(183.7,36.8)
"/CS LCD": U1.21 U3_MCP2.11 | length 221.4
  Top Layer w0.2: v1@56.909,75.947 57.096,76.135 72.3,76.135 72.735,75.7 192.131,75.7 192.678,76.247 194.988,76.247 203.2,68.034 203.2,39.291 199.009,35.1 183.25,35.1 v1(183,35.35)
  Bottom Layer w0.2: U3_MCP2.11@56.909,74.109 v1(56.909,76.037) ; U1.21@179.5,21.21 181.21,21.21 182.1,22.1 182.1,30.3 180.62,31.78 180.62,34.22 181.75,35.35 v1(183,35.35)
"/CS SD": P3.1 U1.26 | length 130.6
  Top Layer w0.2: v1(181,27.5) v1(183.8,27.5) ; 185,31.5 185.8,32.3 200.169,32.3 206.041,38.173 206.041,69.162 195.1,80.103 195.1,123.066 195.5,123.466 v1(195.5,124.6)
  Bottom Layer w0.2: U1.26@179.56,27.5 v1(181,27.5) ; v1(183.8,27.5) 184.4,28.1 184.4,30.8 v1(184.8,31.2) ; v1(195.5,124.6) P3.1@195.5,131.95
/MCLR: C111.2 P2.1 R103.1 U1.1 U3_MCP1.18 U3_MCP2.18 U6.17 | length 357.5
  Top Layer w0.2: U6.17@98.648,71.988 98.648,73.748 99.8,74.9 193.2,74.9 193.553,74.547 194.991,74.547 201.9,67.637 201.9,42.007 ; v1(168.4,3.4) 168.9,2.9 188.5,2.9 P2.1@189,3.4 ; v1(168.4,28.2) 170.4,26.2 186.7,26.2 190.6,30.1 v1(190.7,30.1) ; 185,37 185.7,36.3 198.512,36.3 201.9,39.688 201.9,41.969
  Bottom Layer w0.2: U3_MCP1.18@19.3,83.5 19.3,84.9 24,89.6 52.4,89.6 56.9,85.1 U3_MCP2.18@56.9,83.5 56.9,82.1 58,81 73.272,81 79.872,74.4 97.7,74.4 98.648,73.452 U6.17@98.648,71.988 ; v1(168.4,3.4) 167,4.8 167,28.2 ; v1(168.4,28.2) 167,28.2 ; C111.2@183.5,6.225 184.075,6.8 R103.1@187.875,6.8 189,5.675 P2.1@189,3.4 ; v1(184.7,37.3) 183.6,38.4 169.1,38.4 167,36.3 167,28.2 ; U1.1@188.9,30.1 v1(190.7,30.1)
COD9A: R73_9.2 U1.6 | length 117.8
  Top Layer w0.2: v1(176.7,93.6) 176.8,93.6 176.633,93.433 176.633,79.98 177.613,79 190.915,79 191.785,79 194.5,79 204.841,68.659 204.841,38.67 199.672,33.5 183.4,33.5 v1(183.1,33.2) ; v1(184.05,23.75) v1(187.1,23.75)
  Bottom Layer w0.2: v1(176.7,93.6) 176.7,94.875 R73_9.2@177.3,95.475 ; v1(183.1,33.2) 182.9,33.2 183.1,33 183.1,24.7 v1(184.05,23.75) ; v1(187.1,23.75) U1.6@188.9,23.75
COD9B: R74_9.2 U1.7 | length 108.3
  Top Layer w0.2: v1(182,32.6) 182.2,32.4 183.219,32.4 183.919,33.1 185.094,33.1 199.837,33.1 205.241,38.504 205.241,68.83 194.672,79.4 191.62,79.4 ; v1(183.5,22.48) v1(187.1,22.48) ; v1(190.271,93.605) 190.271,79.96 190.831,79.4 191.081,79.4 ; 191.081,79.4 191.62,79.4
  Bottom Layer w0.2: v1(182,32.6) 182.4,32.6 182.7,32.3 182.7,23.28 v1(183.5,22.48) ; v1(187.1,22.48) U1.7@188.9,22.48 ; R74_9.2@189.725,95.2 189.725,94.151 v1(190.271,93.605) ; R74_9.2@189.8,95.425 R74_9.2@190.271,94.954
COM1: D51_1.1 U4.3 | length 14.6
  Bottom Layer w0.2: U4.3@23.5,24.36 24.66,24.36 25.4,25.1 25.4,32.5 27.5,34.6 D51_1.1@29.565,34.6
COM2: D51_2.1 U4.4 | length 26
  Bottom Layer w0.2: D51_2.1@10.5,38.135 10.535,38.1 17.3,38.1 19.3,36.1 19.3,24.5 20.71,23.09 U4.4@23.5,23.09
COM3: D61.1 U4.5 | length 45.9
  Bottom Layer w0.2: D61.1@3.9,50.365 4.2,50.065 4.2,37.8 5.5,36.5 17.9,36.5 18.6,35.8 18.6,23.4 20.18,21.82 U4.5@23.5,21.82
COM4: D1_1.2 D2_1.2 D3_1.2 D4_1.2 D5_1.2 D6_1.2 D7_1.2 D8_1.2 U4.6 | length 167.8
  Bottom Layer w0.2: U4.6@23.5,20.55 25.25,20.55 26.4,21.7 26.4,31.8 27.4,32.8 48.73,32.8 ; D1_1.2@48.73,30 48.73,32.8 ; D2_1.2@63.73,30 63.73,32.73 ; D3_1.2@78.73,30 78.73,32.73 ; D4_1.2@93.73,30 93.73,32.77 ; D5_1.2@113.73,30 113.73,32.77 ; D6_1.2@128.73,30 128.73,32.73 ; D7_1.2@143.73,30 143.73,32.77 ; D8_1.2@158.73,30 158.73,31.97 157.9,32.8 48.73,32.8
COM5: D1_2.2 D2_2.2 D3_2.2 D4_2.2 D5_2.2 D6_2.2 D7_2.2 D8_2.2 U4.7 | length 159
  Bottom Layer w0.2: U4.7@23.5,19.28 26.98,19.28 27,19.3 39.4,19.3 40.7,18 40.7,13.5 41.7,12.5 156.23,12.5 D8_2.2@158.73,15 ; 48.73,12.53 D1_2.2@48.73,15 ; 63.73,12.53 D2_2.2@63.73,15 ; 78.73,12.53 D3_2.2@78.73,15 ; 93.73,12.53 D4_2.2@93.73,15 ; 113.73,12.57 D5_2.2@113.73,15 ; 128.73,12.53 D6_2.2@128.73,15 ; 143.73,12.53 D7_2.2@143.73,15
COM6: D1_3.2 D2_3.2 D3_3.2 D4_3.2 D5_3.2 D6_3.2 D7_3.2 D8_3.2 U4.8 | length 224.4
  Top Layer w0.2: v1(9.5,61.506) 8.8,60.806 8.8,19.957 10.757,18 v1(25,18)
  Bottom Layer w0.2: v1(9.5,61.506) 11,61.506 11.4,61.906 11.4,75.616 10.4,76.616 10.4,88.1 12.7,90.4 69,90.4 69.7,91.1 69.7,107.5 68.7,108.5 19.2,108.5 18.73,108.03 D1_3.2@18.73,107.5 ; 20,90.4 D5_3.2@20,91.23 ; U4.8@23.5,18.01 23.51,18 v1(25,18) ; D2_3.2@33.73,107.5 33.73,108.5 ; 35,90.4 D6_3.2@35,91.23 ; D3_3.2@48.73,107.5 48.73,108.5 ; 50,90.4 D7_3.2@50,91.23 ; D4_3.2@63.73,107.5 63.73,108.5 ; 65,90.4 D8_3.2@65,91.23
COM7: D1_4.2 D2_4.2 D3_4.2 D4_4.2 D5_4.2 D6_4.2 D7_4.2 D8_4.2 U4.9 | length 225.4
  Top Layer w0.2: v1(36.4,18.2) 36.4,18.3 36.65,18.55 36.65,36.269 36.6,36.319 36.6,39.4 v1(36.8,39.6)
  Bottom Layer w0.2: D1_4.2@17.5,44.27 17.5,43.1 17.9,42.7 42.5,42.7 ; U4.9@23.5,16.74 23.56,16.8 25.5,16.8 26.5,17.8 36.1,17.8 v1@36.6,18.3 ; v1(36.8,39.6) 36.8,42.7 ; D2_4.2@42.5,44.27 42.5,42.7 ; D3_4.2@67.5,44.27 67.5,42.7 ; D4_4.2@92.5,44.27 92.5,42.7 ; D5_4.2@117.5,44.27 117.5,42.7 ; D6_4.2@142.5,44.27 142.5,42.7 ; D7_4.2@167.5,44.27 167.5,42.7 ; D8_4.2@192.5,44.27 192.5,43.4 191.8,42.7 167.5,42.7 ; 42.5,42.7 67.5,42.7 ; 67.5,42.7 92.5,42.7 ; 92.5,42.7 117.5,42.7 ; 117.5,42.7 142.5,42.7 ; 142.5,42.7 167.5,42.7
GND: "P IN.3" C1.2 C2.1 C3.1 C4.2 C5.1 C6.2 C7.1 C8.1 C9.2 C10.1 C21_MCP1.2 C21_MCP2.2 C22_MCP1.2 C22_MCP2.2 C31.1 C32.1 C33.1 C34.1 C35.1 C36.1 C41.2 C42.2 C71_1.1 C71_2.1 C71_3.1 C71_4.1 C71_5.1 C71_6.1 C71_7.1 C71_8.1 C71_9.1 C72_1.2 C72_2.2 C72_3.2 C72_4.2 C72_5.2 C72_6.2 C72_7.2 C72_8.2 C72_9.2 C91.2 C92.2 C101.2 C102.2 C103.2 C104.2 C105.2 C106.2 C107.2 C108.2 C109.2 C110.2 C111.1 Cod_1.C Cod_2.C Cod_3.C Cod_4.C Cod_5.C Cod_6.C Cod_7.C Cod_8.C Cod_9.C P0.2 P1.3 P2.3 P3.0 P3.3 P3.6 P3.S3 R1.1 R3.2 RP91.2 U1.8 U1.19 U1.27 U2.4 U3_MCP1.10 U3_MCP1.15 U3_MCP1.16 U3_MCP1.17 U3_MCP2.10 U3_MCP2.15 U3_MCP2.16 U3_MCP2.17 U4.1 U5.4 U6.1 U6.20 | length 1536.7
  Top Layer w0.4: v1(4.9,84.2) 5,84.3 15.49,84.3 ; v1(11.5,41.5) 12.349,40.651 20.7,40.651 ; v1(15.49,81.01) 15.49,84.3 ; 16,40.98 16,46 Cod_1.C@17.5,47.5 ; v1(20.7,36.6) 20.7,40.651 ; 30,40.88 v1(30,43.7) 30,57.8 27.7,60.1 27.7,84.3 ; 32.35,84.106 32.156,84.3 ; v1(33.5,28.3) v1(33.5,36.5) 33.5,40.574 ; Cod_2.C@42.5,47.5 41,46 41,40.651 ; P0.2@52,136.9 P0.2@52,138.1 69.854,138.1 76.645,131.309 76.645,81.624 80.209,78.061 168.542,78.061 172.7,82.219 v1(172.7,117.6) ; v1(53.09,81.01) 49.8,84.3 32.156,84.3 ; v1(55,43.775) 55,41.9 ; v1(58.17,72) 58.17,72.459 60.111,74.4 77.994,74.4 80.406,71.988 U6.20@91.028,71.988 ; Cod_3.C@67.5,47.5 66,46 66,40.686 ; v1(80,43.8) 79.965,43.835 v1@80.025,43.895 ; Cod_4.C@92.5,47.5 91,46 91,40.686 ; v1(105,43.775) 105,40.686 ; Cod_5.C@117.5,47.5 116,46 116,40.686 ; 129.999,40.921 129.882,40.804 130,40.686 ; Cod_6.C@142.5,47.5 141,46 141,40.686 ; v1(155,58.774) v1(155,43.8) 155,41.9 ; v1(160.72,70.412) 160.72,73.332 161.788,74.4 167.6,74.4 168.7,73.3 v1(168.7,70.1) v1(173.3,70.1) v1(189.8,70.1) ; Cod_7.C@167.5,47.5 166,46 166,40.4 ; v1(171.5,24.7) 171.5,24.2 v1(177.03,18.67) 190.443,18.67 191.49,19.717 v1(191.49,21.21) ; v1(171.5,27.9) 172.4,28.8 v1(181,28.8) 178,28.8 178,31.4 176.3,33.1 167,33.1 166,34.1 166,40.4 ; v1(178.5,137.5) 175.032,137.5 172.7,135.169 v1(172.7,117.6) v1(178,117.6) 180.5,117.6 183.5,114.6 183.5,97.054 Cod_9.C@183.5,92.5 ; v1(180.5,43.775) 180.5,40.4 ; v1(180.8,82.925) 183.5,82.925 ; v1(183.5,88.8) 183.5,82.925 ; v1@188.425,82.925 183.5,82.925 ; Cod_8.C@192.5,47.5 191.5,46.5 191.5,40.4 ; v1(198.5,41.5) 197.4,40.4 191.5,40.4 ; 15.49,84.3 27.7,84.3 ; 20.7,40.651 41,40.651 ; 27.7,84.3 32.156,84.3 ; 41,40.651 53.464,40.651 54.713,41.9 55,41.9 ; 55,41.9 56.38,41.9 57.594,40.686 66,40.686 ; 66,40.686 91,40.686 ; 91,40.686 105,40.686 ; 105,40.686 116,40.686 ; 116,40.686 130,40.686 ; 130,40.686 141,40.686 ; 141,40.686 152.499,40.686 153.713,41.9 155,41.9 ; 155,41.9 155.287,41.9 156.787,40.4 166,40.4 ; 166,40.4 180.5,40.4 ; 180.5,40.4 191.5,40.4
  Top Layer w0.7: 80,40.862 v1(80,43.8) ; v1@80.025,43.895 v1(80.025,63.702) ; 129.999,40.921 v1(129.999,63.676)
  Top Layer w0.75: v1(34.6,116.575) v1(47,116.575) ; v1(37.589,100.503) 37.623,100.503 41.689,104.569 v1(41.689,110.618) ; v1(37.6,98.562) v1(37.6,98.562) v1(42.073,94.091) 42.073,88.34 v1(42.201,88.213)
  Top Layer w1: v1(29.5,135.1) 50.2,135.1 P0.2@52,136.9
  Bottom Layer w0.2: C104.2@181.675,9 181.675,4.4 C111.1@183.5,2.575 183.5,2.35 193.03,2.35 P2.3@194.08,3.4 ; v1(188.5,83) 187.8,82.3 187.8,78.9 188.2,78.5 U2.4@188.9,78.5
  Bottom Layer w0.3: C9.2@34.5,132.2 36.5,132.2 38.132,130.568 38.132,121.257 40.989,118.4 42.675,118.4 C5.1@44.5,116.575
  Bottom Layer w0.4: v1(11.5,41.5) 11.5,43.275 C71_1.1@12,43.775 ; v1(15.49,81.01) U3_MCP1.15@15.49,83.5 ; v1(16.76,81) U3_MCP1.16@16.76,83.5 ; C22_MCP1.2@17.775,67.5 C21_MCP1.2@17.775,70 17.775,71.475 18,71.7 v1(20.1,71.7) 20.57,72.17 U3_MCP1.10@20.57,74.1 ; v1(18.03,81.03) U3_MCP1.17@18.03,83.5 ; v1(20.7,36.6) v1@33.4,36.6 ; v1@20.725,36.575 C32.1@20.725,34.4 C31.1@20.725,30 20.725,27.775 21.6,26.9 U4.1@23.5,26.9 ; C72_1.2@23,43.775 C71_2.1@37,43.775 ; C36.1@29,26.95 C35.1@32,26.95 33.5,26.95 ; v1(33.5,28.3) 33.5,26.95 ; C34.1@38,26.95 C33.1@35,26.95 33.5,26.95 ; C72_2.2@48,43.775 v1(55,43.775) C71_3.1@62,43.775 ; v1(53.09,81.01) U3_MCP2.15@53.09,83.5 ; v1(54.36,81.06) U3_MCP2.16@54.36,83.5 ; C22_MCP2.2@55.5,67.4 55.5,70.7 56.3,71.5 57.7,71.5 58.17,71.97 v1(58.17,72) U3_MCP2.10@58.17,74.1 58.17,78.49 v1(55.63,81.03) U3_MCP2.17@55.63,83.5 ; C72_3.2@73,43.775 C71_4.1@87,43.775 ; C72_4.2@98,43.775 v1(105,43.775) 109.525,43.775 C71_5.1@112,43.775 ; C72_5.2@123,43.775 v1(130,43.775) C71_6.1@137,43.775 ; C72_6.2@148,43.775 C71_7.1@162,43.775 ; v1@160.72,65.245 v1(160.72,70.412) ; C102.2@170,26.175 v1@171.488,24.688 ; C107.2@170.4,23.6 v1@171.488,24.688 ; v1(171.5,24.7) v1@171.488,24.688 ; C108.2@173,23.525 172.65,23.525 v1@171.5,24.675 ; C101.2@173,26.175 v1@171.5,24.675 ; C72_7.2@173,43.775 v1(180.5,43.775) C71_8.1@187,43.775 ; P3.0@174.4,134.1 P3.0@174.6,134.3 ; P3.0@174.45,134.45 174.45,136.65 175.3,137.5 183.2,137.5 ; U5.4@175.7,69.81 175.425,70.085 C41.2@175.425,73 175.425,74.2 ; v1(177.03,18.67) U1.19@179.5,18.67 181.23,18.67 181.675,18.225 C103.2@181.675,11.3 v1(181.675,10.15) C104.2@181.675,9 ; P3.S3@177.95,114.55 178,114.6 v1(178,117.6) ; C71_9.1@178.5,88.775 C72_9.2@188.5,88.775 190.409,88.775 191.484,87.7 197.187,87.7 198.647,86.24 200.7,86.24 202.941,88.481 202.941,93.999 P1.3@200.7,96.24 ; v1@178.7,73.6 178.1,74.2 175.425,74.2 ; U1.27@179.4,28.9 179.5,28.8 v1(181,28.8) ; C110.2@183,82.925 v1(180.8,82.925) C109.2@178.7,82.925 176.425,82.925 175.425,81.925 C42.2@175.425,75.5 175.425,74.2 ; P3.6@183.2,132.65 183.2,137.5 ; v1(183.5,88.8) Cod_9.C@183.5,92.5 ; U1.8@188.9,21.21 v1(191.49,21.21) 194.49,21.21 v1(194.5,21.2) v1(194.5,27.5) v1(198.5,27.5) v1(198.5,24) 204,24 204.625,23.375 C105.2@204.625,22.1 C106.2@204.625,16.6 204.625,15.125 204,14.5 198.5,14.5 v1(198.5,11) v1(194.5,11) v1(194.5,17.5) ; P3.3@190.7,133.45 190.7,137.5 ; P2.3@194.08,3.4 P2.3@194.1,3.38 ; C72_8.2@198,43.775 198.025,43.8 198.025,43.599 198.5,43.125 v1(198.5,41.5) ; P1.3@200.84,96.3 P1.3@200.9,96.24 ; P3.0@202.55,134.45 202.55,136.35 201.4,137.5 190.7,137.5 ; v1@171.488,24.688 v1@171.5,24.675 ; 183.2,137.5 190.7,137.5
  Bottom Layer w0.7: v1(27.708,63.676) v1(129.999,63.676)
  Bottom Layer w0.75: R3.2@25.325,135.6 C8.1@25.325,133.1 29.5,133.1 C9.2@34.5,133.1 ; C10.1@29.5,132.025 29.5,133.063 ; C6.2@32,116.3 32.275,116.575 v1(34.6,116.575) 35.732,116.575 ; C7.1@37,116.575 35.732,116.575 ; v1@37.589,98.573 v1(37.589,100.503) ; v1(41.689,110.618) 35.732,116.575 ; v1(42.201,88.213) 49.513,80.9 v1@52.98,80.9
  Bottom Layer w1: 29.5,133.063 29.5,133.1 v1(29.5,135.1) ; v1(41.689,110.618) 47,115.928 v1(47,116.575) ; C5.1@44.5,116.575 v1(47,116.575) ; C1.2@47.275,132.025 C2.1@52,132.025 ; C4.2@49.225,116.575 v1(47,116.575) ; P0.2@52,138.1 C2.1@52,132.025 ; R1.1@56.275,135.6 C3.1@56.275,133.1 56.275,132.675 55.625,132.025 C2.1@52,132.025 ; U6.1@139.288,71.988 152.312,71.988 153.95,70.35 153.95,65.25 C92.2@158.525,65.25 ; RP91.2@153.95,65.05 153.95,63.39 154.3,63.04 154.3,59.759 155,59.059 v1(155,58.774) ; C92.2@158.7,65.225 v1(160.7,65.225)
  other v1: 198.5,14.4 204.6,19.3 21.2,27.3 178.9,73.6 31.5,133.1 196,137.5
"INT HT16": U1.16 U4.10 | length 195.1
  Top Layer w0.2: v1(17.8,5.5) 23.4,5.5 v1(23.5,5.4)
  Bottom Layer w0.2: v1(17.8,5.5) 17.8,5.2 21.5,1.5 174.331,1.5 175.4,2.569 175.4,13.9 176.4,14.9 178.56,14.9 U1.16@178.8,14.66 ; v1(23.5,5.4) 20.3,8.6 20.3,14.8 20.97,15.47 U4.10@23.5,15.47
"INTA MCP": U1.4 U3_MCP1.20 | length 247.5
  Top Layer w0.2: v1(43.5,80) 54.8,68.7 56.034,68.7 64.688,68.7 136.473,68.7 199.706,68.7 201.1,67.306 201.1,40.02 198.18,37.1 187.9,37.1 v1(187,38)
  Bottom Layer w0.2: U3_MCP1.20@21.84,83.5 21.84,84.54 22.2,84.9 38.6,84.9 v1(43.5,80) ; v1(187,38) 192.8,32.2 192.8,28.3 190.79,26.29 U1.4@188.9,26.29
"INTB MCP": U1.5 U3_MCP1.19 | length 255.3
  Top Layer w0.2: v1(45.8,79.5) 45.8,79.481 50.731,74.55 50.75,74.55 56.2,69.1 64.854,69.1 ; 64.854,69.1 136.307,69.1 ; 136.307,69.1 199.872,69.1 201.5,67.472 201.5,42.172 ; 186,37.5 186.8,36.7 198.346,36.7 201.5,39.854 201.5,42.134
  Bottom Layer w0.2: U3_MCP1.19@20.57,83.5 20.57,84.87 21,85.3 40,85.3 v1(45.8,79.5) ; v1(185.8,37.8) 185.8,37.7 185.8,38.5 186.1,38.8 187.3,38.8 193.5,32.6 193.5,28 190.52,25.02 U1.5@189.9,25.02